# Altium PCB Switchboard_host.PcbDoc
Units mm, origin at the board's own origin, x right, y up, seen from the top; angles counter-clockwise.
Board outline 20 x 30 mm, 2 copper layers (Top Layer, Bottom Layer); 3 components, 5 nets, 22 pads, 0 vias.
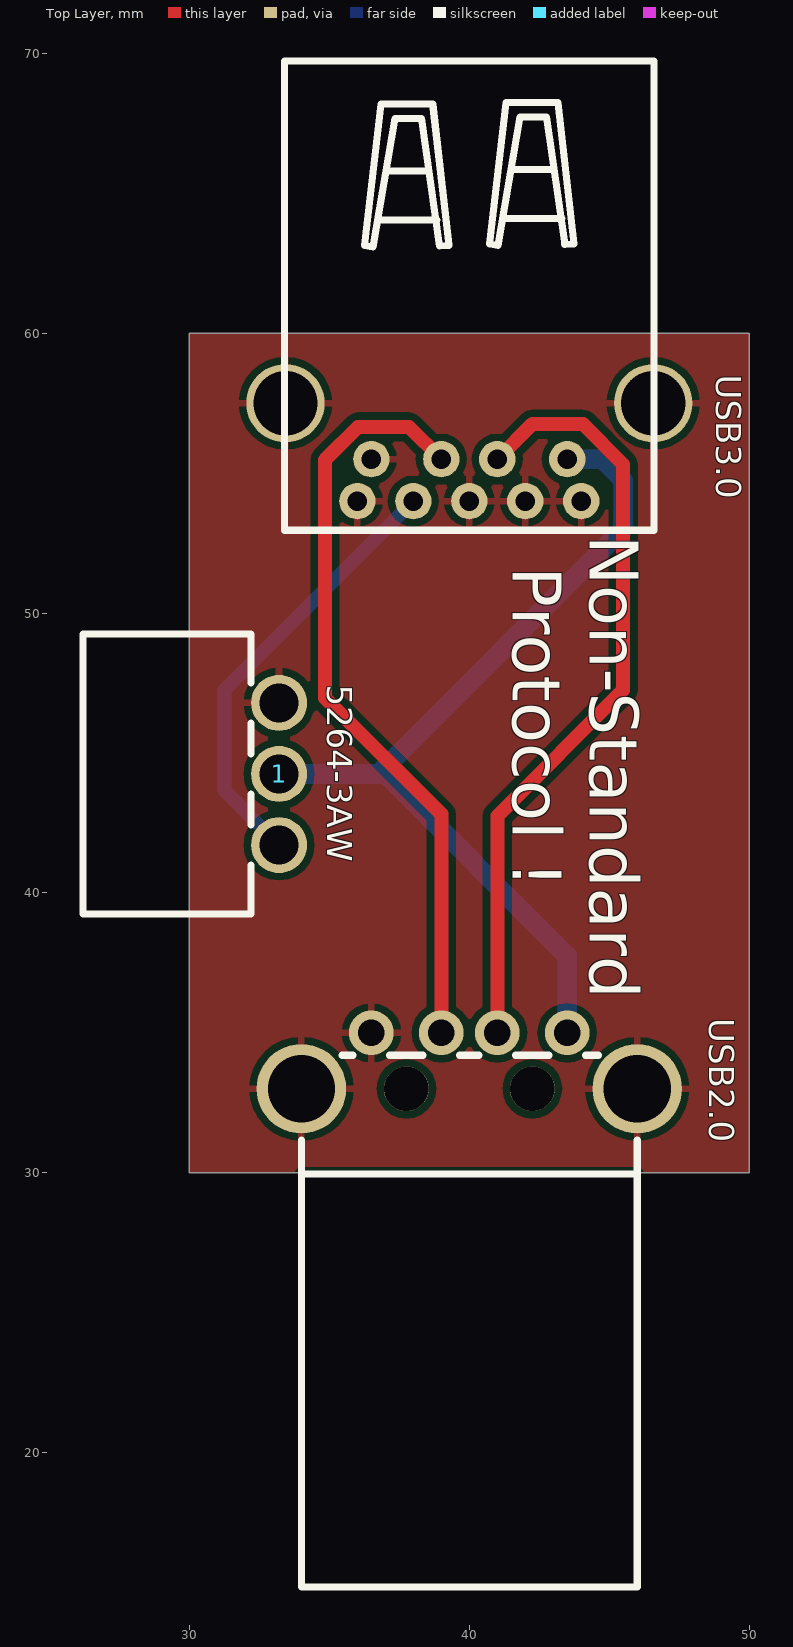
[diagram p0: Top Layer view]
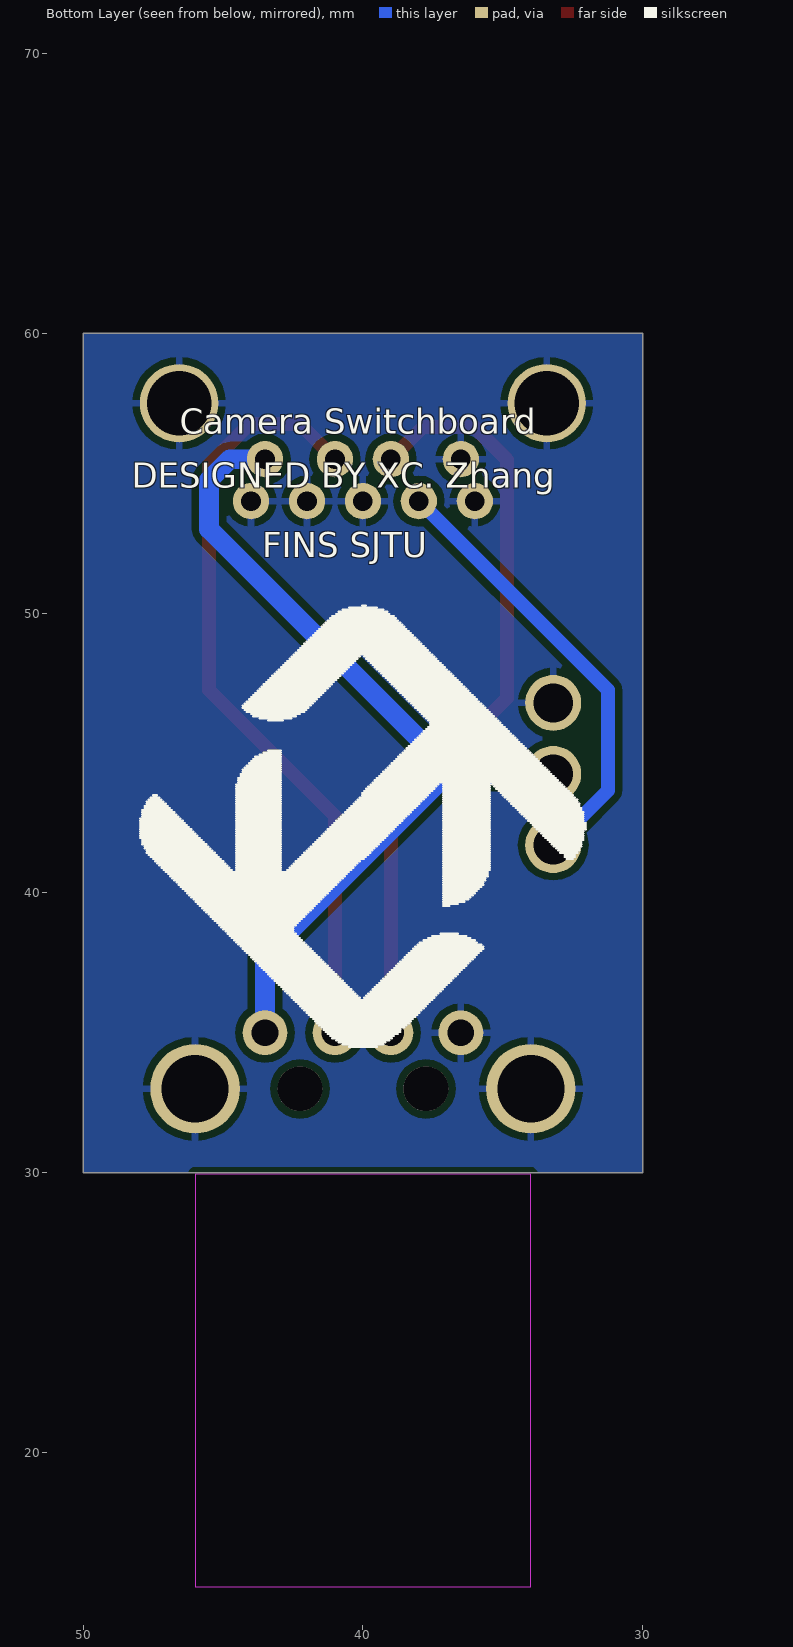
[diagram p1: Bottom Layer view, seen from below]

## Layer stack, top to bottom
Top Solder: solder mask 0.0102, Solder Resist, Dk 3.5
Top Layer: signal copper 0.0356
Dielectric 1: dielectric 0.32, FR-4, Dk 4.8
Bottom Layer: signal copper 0.0356
Bottom Solder: solder mask 0.0102, Solder Resist, Dk 3.5

## Board outline
30,30 50,30 50,60 30,60

## Design rules (kind name [scope] priority, off if disabled: settings)
Clearance [All] p1: gap=0.254 ignorepadtopadclearanceinfootprint=FALSE except(0: Arc-Hole Track-Hole SMDPad-Hole THPad-Hole Via-Hole Fill-Hole Poly-Hole Region-Hole Text-Hole)
PolygonConnect [All] p1: connectstyle=Relief reliefconductorwidth=0.254 reliefentries=4 polygonreliefangle="90 Angle" airgapwidth=0.254
RoutingVias [All] p1: holewidth=0.711 width=1.27 viastyle="Through Hole" minholewidth=0.711 minwidth=1.27 maxholewidth=0.711 maxwidth=1.27
SolderMaskExpansion [All] p1: expansion=0.102 istentingtop=FALSE
Width [All] p1: maxlimit=2 minlimit=0.254 preferedwidth=0.5 minimp=50.000000 maximp=50.000000 favimp=50.000000
30 further rules are at their usual default settings.

## Components (designator, comment, footprint, x,y, rotation, side; value= is the part's Value field where it differs from the comment)
1 "5264-3AW" CONN-TH_5264-3AW 32.5,44.25 r270 top
USB2.0 "USB-211-BCW" USB-A-TH_USB-211-BCW 40,34 r0 top locked
USB3.0 "USB-3.0-AF-90-16.5X12.5-H6.95" USB-3.0-TH_C69073 40,55.75 r180 top

## Footprints (in the part's own frame and the unit in brackets; to place one, negate y for a bottom-side part, rotate by r counter-clockwise, add the part's x,y. Pads: shape width x height; smd on the part's side, far side on the other; paste and mask are expansions set on the pad)
CONN-TH_5264-3AW [mm]
  round 2 hole 1.4: 1(2.54,0.7) 2(0,0.7) 3(-2.54,0.7)
  silkscreen extent -5,-6.3 5,-0.3
USB-3.0-TH_C69073 [mm]
  round 1.3 hole 0.7: 1(-3.5,0.25) 2(-1,0.25) 3(1,0.25) 4(3.5,0.25) 5(4,1.75) 6(2,1.75) 7(0,1.75) 8(-2,1.75) 9(-4,1.75)
  round 2.8 hole 2.3: 10(-6.57,-1.75) 11(6.57,-1.75)
  silkscreen extent -6.6,-13.97 6.6,2.79
USB-A-TH_USB-211-BCW [mm]
  round 1.6 hole 0.95: 1(3.5,1) 2(1,1) 3(-1,1) 4(-3.5,1)
  round 3.2 hole 2.4: 5(-6,-1) 5(6,-1)
  round 1.6 hole 1.6 unplated: ""(-2.25,-1) ""(2.25,-1)
  Keep-Out Layer board cut-out: -6,-4.05 6,-4.05 6,-18.8 -6,-18.8 -6,-18.8
  silkscreen extent -6,-18.8 6,0.2

## Part data
1: BOM_Manufacturer=ReliaPro, BOM_Manufacturer Part=5264-3AW, BOM_Paste Type=expand, BOM_Supplier=LCSC, BOM_Supplier Part=C48374, spicePre=C, spiceSymbolName=5264-3AW
USB2.0: BOM_Manufacturer=XUNPU, BOM_Manufacturer Part=USB-211-BCW, BOM_Paste Type=expand, BOM_Supplier=LCSC, BOM_Supplier Part=C720520, Contributor=LCSC, spicePre=U, spiceSymbolName=USB-211-BCW
USB3.0: BOM_Manufacturer=LCSC, BOM_Manufacturer Part=USB-3.0-AF-90-16.5X12.5-H6.95, BOM_Paste Type=expand, BOM_Supplier=LCSC, BOM_Supplier Part=C69073, Contributor=LCSC, spicePre=U, spiceSymbolName=USB-3.0-AF-90-16.5X12.5-H6.95

## Nets (pads, with @x,y where several pads share a name; then routed paths per layer and width w, separated by ;. In a path a pad name is that pad's centre, name@x,y a point inside that pad or via, vN(x,y) a via of type N, cw(c..) or ccw(c..) an arc to the next point about the centre after c; other vN are vias at no path point)
+5: 1.2 USB2.0.1 USB3.0.1 | length 32.2
  Bottom Layer w0.7: 1.2 37,44.25 43.5,37.75 USB2.0.1 ; 36.75,44.25 45.5,53 45.5,54.75 44.75,55.5 USB3.0.1
D+: USB2.0.3 USB3.0.3 | length 27.3
  Top Layer w0.5: USB2.0.3 39,42.811 34.846,46.965 34.846,55.478 36.022,56.654 37.846,56.654 USB3.0.3
D-: USB2.0.2 USB3.0.2 | length 27.8
  Top Layer w0.5: USB2.0.2 41,42.75 45.5,47.25 45.5,55.311 44.061,56.75 42.25,56.75 USB3.0.2
GND: 1.3 USB2.0.4 USB2.0.5 USB3.0.4 USB3.0.5 USB3.0.7 USB3.0.8 USB3.0.9 USB3.0.10 USB3.0.11
S: 1.1 USB3.0.6 | length 15.9
  Bottom Layer w0.5: 1.1 31.25,43.66 31.25,47.25 USB3.0.6
pads on no net: USB2.0.

## Polygon pours and split planes (outlines as drawn)
GND on Top Layer "GND_L01_P000" (solid, pour order 0): 30,30 50,30 50,60 30,60
GND on Bottom Layer "GND_L02_P001" (solid, pour order 1): 30,30 50,30 50,60 30,60

## Silkscreen, mask and mechanical layers (free items; w line width, h text height)
Top Overlay:
  text "Non-Standard" at 43.729,52.784 h3 r270
  text "Protocol !" at 40.979,51.659 h3 r270
Bottom Overlay:
  drawing of 457 lines, arcs and shapes, not listed
  text "Camera Switchboard" at 46.54,56.107 h1.52
  text "DESIGNED BY XC. Zhang" at 48.267,54.171 h1.52
  text "FINS SJTU" at 43.594,51.696 h1.52
Mechanical 1:
  the board outline again, w0.254